# EAGLE board protonode-xmega-mc-headers-qfp-a4 (EAGLE 5.10)
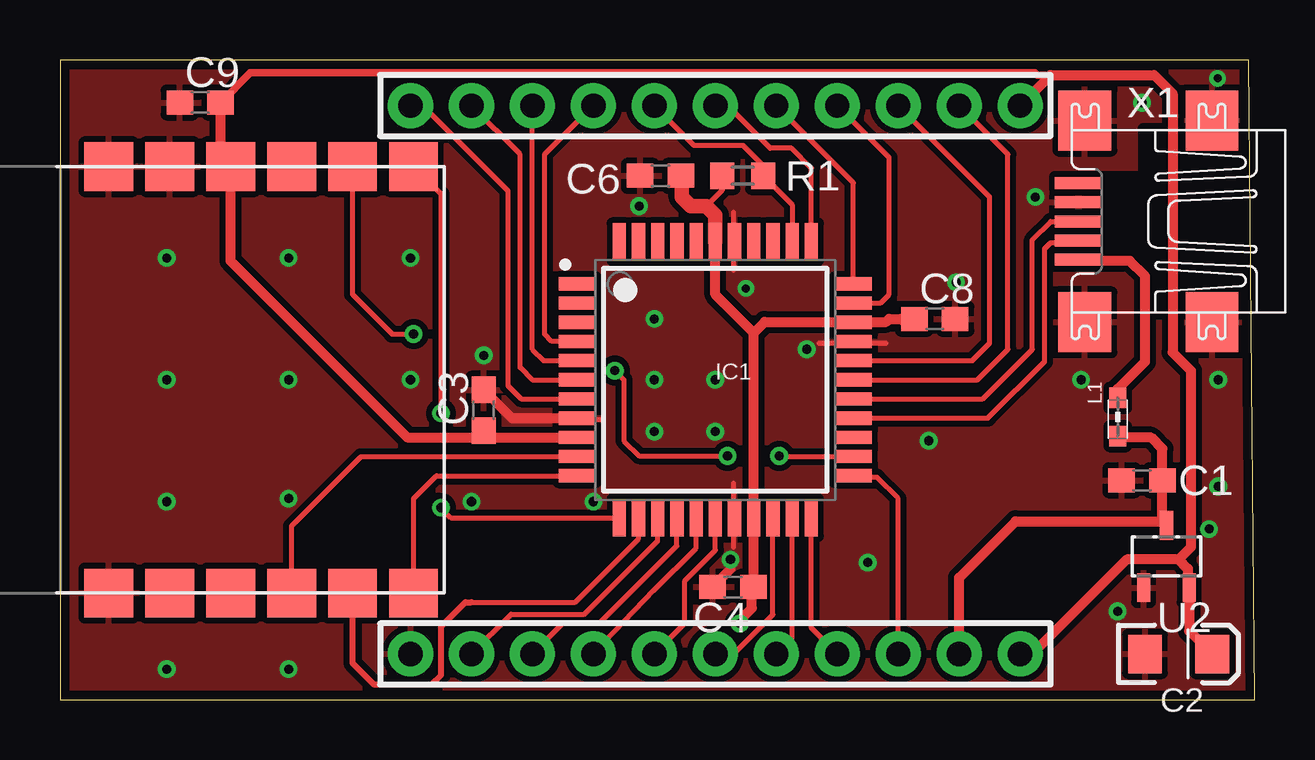
[diagram p0: board, top side]
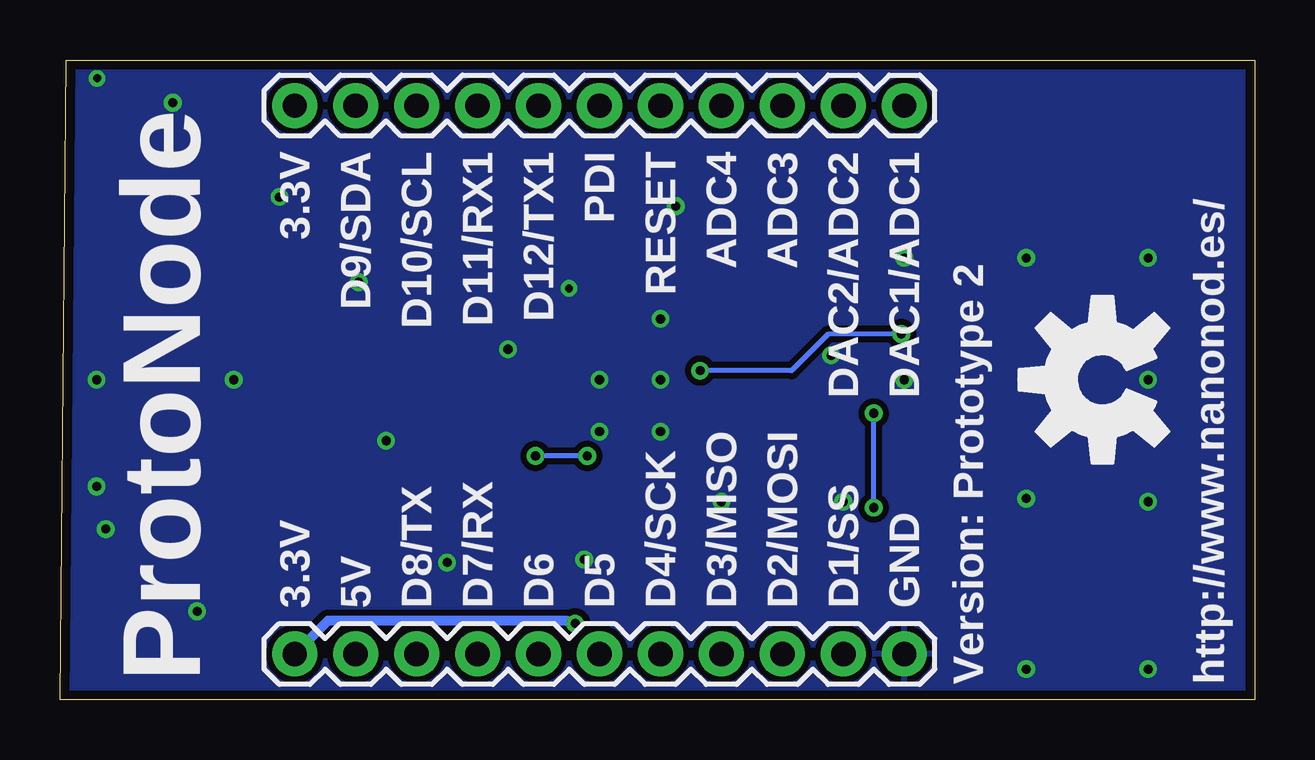
[diagram p1: board, bottom side, seen from below]

Size 49.78 x 26.67 mm. Coordinates in mm from the lower left corner, seen from the top.
Outline: 49.53,26.67 0,26.67 0,0 49.78,0 49.53,26.67
Copper layers (1*16): Top 0.0356mm / dielectric 1.5011mm / Bottom 0.0356mm
Design rules "LaenPCBOrder": minimum track width 6mil, minimum drill 13mil, track to track 6mil, track to pad 6mil, pad to pad 6mil, via to via 6mil, smd to smd 6mil, copper to edge 15mil, drill to drill 6mil, minimum pad ring 7mil, minimum via ring 7mil, stop-mask expansion 4mil, vias tented up to drill 0mil, thermal gap 10mil

## Footprints (pad centres in the part's own frame; a part is rotated, then mirrored left to right if it is on the bottom)
C0603 = smd 1.1 x 1: 1 -0.85,0; 2 0.85,0
EIA3216 = smd 1.4 x 1.6: A 1.4,0; C -1.4,0
TQFP-44 = smd 1.55 x 0.55: 1 -5.75,4; 2 -5.75,3.2; 3 -5.75,2.4; 4 -5.75,1.6; 5 -5.75,0.8; 6 -5.75,0; 7 -5.75,-0.8; 8 -5.75,-1.6; 9 -5.75,-2.4; 10 -5.75,-3.2; 11 -5.75,-4; 23 5.75,-4; 24 5.75,-3.2; 25 5.75,-2.4; 26 5.75,-1.6; 27 5.75,-0.8; 28 5.75,0; 29 5.75,0.8; 30 5.75,1.6; 31 5.75,2.4; 32 5.75,3.2; 33 5.75,4 | smd 0.55 x 1.55: 12 -4,-5.75; 13 -3.2,-5.75; 14 -2.4,-5.75; 15 -1.6,-5.75; 16 -0.8,-5.75; 17 0,-5.75; 18 0.8,-5.75; 19 1.6,-5.75; 20 2.4,-5.75; 21 3.2,-5.75; 22 4,-5.75; 34 4,5.75; 35 3.2,5.75; 36 2.4,5.75; 37 1.6,5.75; 38 0.8,5.75; 39 0,5.75; 40 -0.8,5.75; 41 -1.6,5.75; 42 -2.4,5.75; 43 -3.2,5.75; 44 -4,5.75
1X11 = drill 1.016 pad 1.88 round: 1 0,0; 2 2.54,0; 3 5.08,0; 4 7.62,0; 5 10.16,0; 6 12.7,0; 7 15.24,0; 8 17.78,0; 9 20.32,0; 10 22.86,0; 11 25.4,0
0603 = smd 0.85 x 0.7: 1 -0.9,0; 2 0.7,0
R0603 = smd 1 x 1.1: 1 -0.85,0; 2 0.85,0
SOT23-3 = smd 0.55 x 1.2: 1 0.95,1.3; 2 -0.95,1.3; 3 0,-1.3
MRF24J40MA = smd 2.032 x 2.032: 1 -13.97,0; 2 -11.43,0; 3 -8.89,0; 4 -6.35,0; 5 -3.81,0; 6 -1.27,0; 7 -1.27,17.78; 8 -3.81,17.78; 9 -6.35,17.78; 10 -8.89,17.78; 11 -11.43,17.78; 12 -13.97,17.78
UX60A-MB-5ST = smd 2 x 0.5: 1 2.25,1.6; 2 2.25,0.8; 3 2.25,0; 4 2.25,-0.8; 5 2.25,-1.6 | smd 2.2 x 2.5: M1 -3.3,-4.2; M2 -3.3,4.2; M3 2,4.2; M4 2,-4.2

## Placement (x,y rotation side)
C1  1uF  [C0603]  45.09,9.14 180 top
C2  10uF  [EIA3216]  46.61,1.91 0 top
C3  0.1uF  [C0603]  17.65,12.06 90 top
C4  0.1uF  [C0603]  28.04,4.7 180 top
C6  0.1uF  [C0603]  25.02,21.84 180 top
C8  0.1uF  [C0603]  36.45,15.88 0 top
C9  0.1uF  [C0603]  5.84,24.89 0 top
IC1  [TQFP-44]  27.3,13.34 0 top
JP1  M11PTH  [1X11]  14.61,24.77 180 bottom
JP2  M11PTH  [1X11]  14.61,1.91 180 bottom
L1  220 Ohm  [0603]  44.07,11.68 270 top
R1  1K  [R0603]  28.45,21.84 180 top
U2  VREG  [SOT23-3]  46.1,5.97 180 top
U$1  [OSHW-LOGO-L]  6.35,13.34 90 bottom
U$5  MRF24J40MA  [MRF24J40MA]  16,4.45 0 top
X1  UX60A-MB-5ST  [UX60A-MB-5ST]  44.7,19.94 180 top

## Library data of the parts
C1 C3 C4 C6 C8 C9 R1 = rcl
C2 JP1 JP2 U$1 = sparkfun
IC1 U2 = nonolith
L1 = wuerth-elektronik
U$5 = custom
X1 = usb_con-update

## Nets
3.3V: C2.A C3.1 C4.1 C6.1 C8.1 C9.2 IC1.9 IC1.19 IC1.31 IC1.39 JP1.11 JP2.11 R1.2 U2.2 U$5.10
5V: L1.1 X1.1
5VINT: C1.1 JP2.10 L1.2 U2.3
ADC0: IC1.5 JP1.3
ADC1: IC1.4 JP1.4
D+: IC1.27 X1.3
D-: IC1.26 X1.2
DAC0: IC1.7 JP1.1
DAC1: IC1.6 JP1.2
GND: C1.2 C2.C C3.2 C4.2 C6.2 C8.2 C9.1 IC1.8 IC1.18 IC1.30 IC1.38 JP2.1 U2.1 U$5.1 U$5.11 U$5.12 X1.4 X1.M1 X1.M2 X1.M3 X1.M4
IRQ: IC1.10 U$5.4
MISO: IC1.12 U$5.7
MISO1: IC1.16 JP2.4
MOSI: IC1.13 U$5.5
MOSI1: IC1.15 JP2.3
PDI: IC1.34 JP1.6
PWM0: IC1.20 JP2.6
PWM1: IC1.21 JP2.7
RD_RST: U$5.2
RD_WAKE: U$5.3
RST: IC1.35 JP1.5 R1.1
RX: IC1.22 JP2.8
RX1: IC1.32 JP1.8
SCK: IC1.11 U$5.6
SCK1: IC1.17 JP2.5
SCL: IC1.29 JP1.9
SDA: IC1.28 JP1.10
SS: IC1.24 U$5.8
SS1: IC1.14 JP2.2
TX: IC1.23 JP2.9
TX1: IC1.33 JP1.7

## Tracks (layer width: path | path; a pad name or v marks a point on that pad's centre or on a via)
3.3V  (via drill 0.38)
  Top 0.203: 35.56,15.88 35.43,16 | R1.2 27.6,21.25 26.92,20.57
  Top 0.305: 41.27,26.04 40.72,26.04 40.62,26.14 7.94,26.14 C9.2
  Top 0.406: 28.91,15.29 IC1.19 28.91,4.43 28.83,4.51 | 28.91,15.29 27.3,16.89 IC1.39 | 33.07,15.75 34.42,15.75 34.54,15.88 35.05,15.88 | 33.07,15.75 IC1.31 | 35.05,15.88 35.56,15.88 C8.1 | 35.43,15.62 35.31,15.62 35.05,15.88 | 17.93,10.94 IC1.9 | 17.93,10.94 C3.1 | C2.A 47.05,2.86 U2.2 46.99,4.73 46.99,5.46 46.61,5.84 | C9.2 6.69,22.31 U$5.10 7.11,18.29 14.46,10.94 17.93,10.94 | C9.2 6.73,24.93 | JP2.11 40.51,1.91 44.45,5.84 46.61,5.84 | v28.32,3.17 28.32,3.3 28.83,3.81 28.83,4.51 | JP1.11 41.27,26.04 45.59,26.04 46.35,25.27 46.35,14.48 47.12,13.72 47.12,6.35 46.61,5.84 | C9.2 6.99,25.18 | C4.1 28.83,4.66 28.83,4.51 | 33.07,15.75 29.36,15.75 28.91,15.29
  Top 0.61: IC1.39 27.3,20.19 26.92,20.57 26.29,20.57 25.91,20.95 25.91,21.8 C6.1
  Bottom 0.406: v28.32,3.17 28.7,3.3 38.61,3.3 JP2.11
5V
  Top 0.406: L1.1 44.07,12.95 45.21,14.1 45.21,17.65 44.58,18.29 43.27,18.29 X1.1
5VINT
  Top 0.406: L1.2 44.13,10.92 45.47,10.92 45.94,10.45 C1.1 45.94,7.43 | 45.94,7.43 U2.3 | 45.94,7.43 39.82,7.43 37.47,5.08 JP2.10
ADC0
  Top 0.203: IC1.5 20.16,14.13 19.68,14.61 JP1.3
ADC1
  Top 0.203: IC1.4 20.5,14.94 20.19,15.24 20.19,22.73 JP1.4
D+
  Top 0.203: IC1.27 38.44,12.54 40.51,14.61 40.51,19.18 41.27,19.94 X1.3
D-
  Top 0.203: IC1.26 38.66,11.73 41.02,14.1 41.02,18.8 41.27,19.05 42.62,19.05 X1.2 43.13,19.05
DAC0
  Top 0.203: IC1.7 19.21,12.54 18.67,13.08 18.67,21.21 15.11,24.77 JP1.1
DAC1
  Top 0.203: IC1.6 19.68,13.34 19.18,13.84 19.18,22.73 JP1.2
GND  (via drill 0.33, 0.38)
  Top 0.203: 28.07,6.35 28.07,9.02 | 31.62,14.86 34.42,14.86 | 22.61,11.68 20.19,11.68 20.07,11.81 | 28.07,17.91 28.07,20.32
  Top 0.406: IC1.8 18.83,11.73 C3.2 | v27.94,5.84 27.94,5.45 C4.2
  other vias: 4.45,18.41 9.53,18.41 4.45,13.34 9.53,13.34 4.45,8.26 47.88,7.11 4.45,1.27 9.53,1.27 9.53,8.38 14.61,18.41 14.61,13.34 17.65,14.35 17.14,8.26 22.23,8.26 24.77,15.88 24.77,13.34 24.77,11.18 27.3,11.18 27.3,13.34 36.2,10.79 33.66,5.71 37.34,17.4 24.13,20.57 31.11,14.61 40.64,20.95 45.09,24.89 48.23,25.91 42.55,13.34 48.26,13.34 48.26,8.89 44.07,3.68 28.57,17.14
  pour Top (isolate 0.254): 49.53,26.67 0,26.67 0,0 49.78,0
  pour Bottom (isolate 0.254): 49.53,26.67 0,26.67 0,0 49.78,0
IRQ
  Top 0.203: IC1.10 12.55,10.13 9.65,7.24 U$5.4
MISO  (via drill 0.38)
  Top 0.203: IC1.12 16.29,7.58 v15.88,8 | v15.88,11.94 15.88,21.08 U$5.7
  Bottom 0.203: v15.88,8 v15.88,11.94
MISO1
  Top 0.203: IC1.16 26.5,6.31 24.77,4.57 JP2.4
MOSI
  Top 0.203: IC1.13 24.11,6.71 21.46,4.06 17.14,4.06
  Top 0.254: 17.14,4.06 16.89,4.06 15.88,3.05 15.88,1.02 15.49,0.64 13.08,0.64 12.19,1.52 U$5.5
MOSI1
  Top 0.203: IC1.15 25.7,6.4 22.48,3.17 20.95,3.17 JP2.3
PDI
  Top 0.203: IC1.34 31.3,22.16 30.48,22.99 29.59,22.99 27.81,24.77 JP1.6
PWM0
  Top 0.203: IC1.20 29.7,3.54 28.07,1.91 JP2.6
PWM1
  Top 0.203: IC1.21 30.5,2.56 JP2.7
RST
  Top 0.203: IC1.35 30.5,20.64 R1.1 29.3,22.26 28.45,23.11 26.42,23.11 JP1.5
RX
  Top 0.203: IC1.22 31.3,2.98 JP2.8
RX1
  Top 0.203: IC1.32 34.19,16.54 34.54,16.89 34.54,22.61 JP1.8
SCK
  Top 0.203: IC1.11 15.69,9.34 14.73,8.38 U$5.6
SCK1
  Top 0.203: IC1.17 27.3,6.22 26.04,4.95 26.04,3.17 JP2.5
SCL
  Top 0.203: IC1.29 38.01,14.13 38.73,14.86 38.73,20.95 JP1.9
SDA
  Top 0.203: IC1.28 38.23,13.34 39.5,14.61 39.5,22.73 JP1.10
SS  (via drill 0.38)
  Top 0.203: IC1.24 30,10.13 v29.97,10.16 | v27.81,10.16 24.13,10.16 23.5,10.79 23.5,13.34 v23.11,13.72 | v14.73,15.24 13.84,15.24 12.19,16.89 U$5.8
  Bottom 0.203: v27.81,10.16 v29.97,10.16 | v23.11,13.72 19.3,13.72 17.78,15.24 v14.73,15.24
SS1
  Top 0.203: IC1.14 24.91,6.62 21.84,3.56 18.8,3.56 JP2.2
TX
  Top 0.203: IC1.23 33.12,9.27 34.04,9.27 34.92,8.38 JP2.9
TX1
  Top 0.203: IC1.33 33.05,21.55 JP1.7

## Text on the board
bPlace: DAC1/ADC1 | DAC2/ADC2 | ADC3 | ADC4 | RESET | PDI | D12/TX1 | D11/RX1 | D10/SCL | D9/SDA | 3.3V | GND | D1/SS | D2/MOSI | D3/MISO | D4/SCK | D5 | D6 | D7/RX | D8/TX | 5V | 3.3V | http://www.nanonod.es/ | Version: Prototype 2 | ProtoNode